# Altium PCB Dental Sensor - V400.PcbDoc
Units mm, origin at the board's own origin, x right, y up, seen from the top; angles counter-clockwise.
Board outline 55.82 x 8.5 mm, 2 copper layers (Top Layer, Bottom Layer), stack 0.287 mm thick; 23 components, 22 nets, 134 pads, 74 vias.
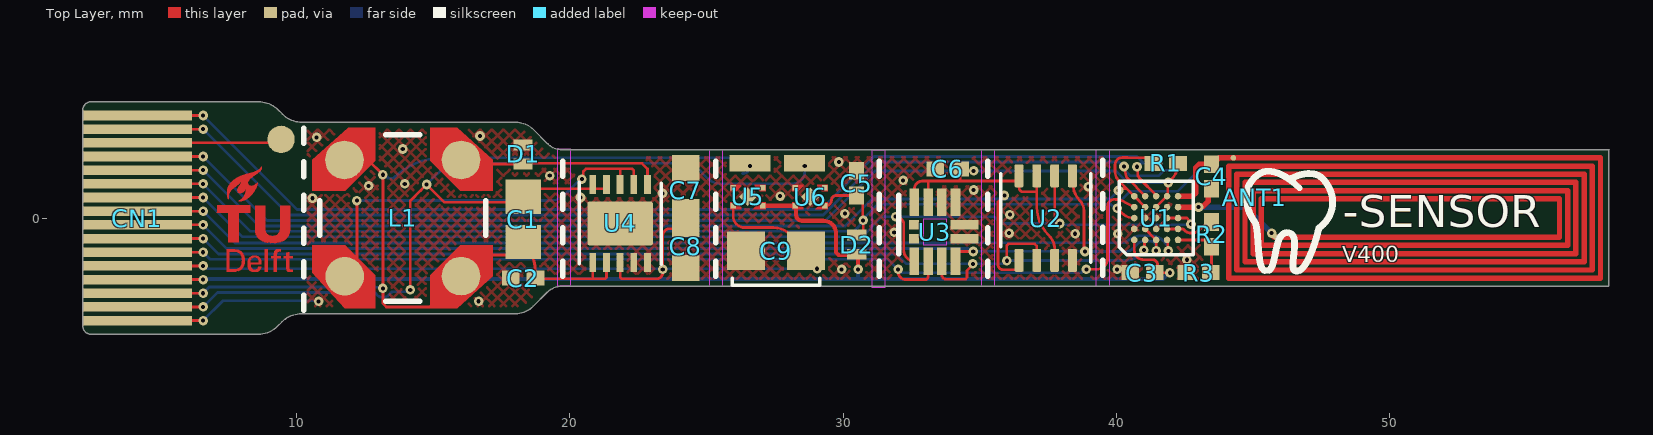
[diagram p0: Top Layer view]
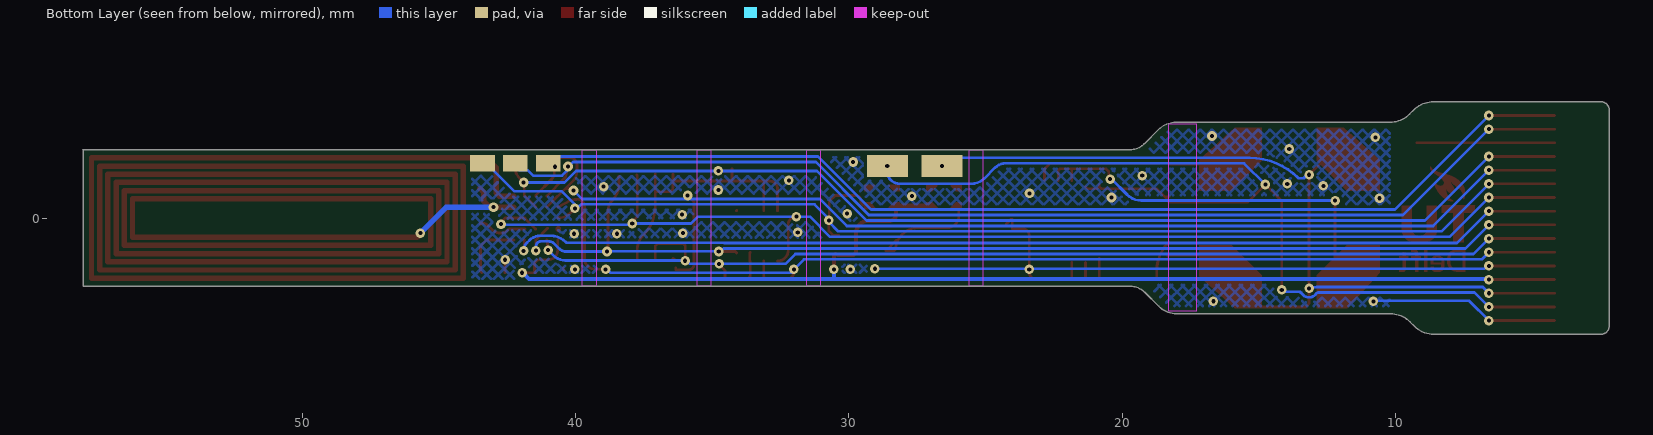
[diagram p1: Bottom Layer view, seen from below]

## Layer stack, top to bottom
Flex Stack Top Coverlay: solder mask 0.05, FC-001, Dk 4
Top Layer: signal copper 0.018
Core: core 0.051, Core-025, Dk 4.6
Bottom Layer: signal copper 0.018
Flex Stack Bottom Coverlay: solder mask 0.05, FC-001, Dk 4
Stiffener 1: core 0.2, Core-009, Dk 4.5

## Board outline
2.491,-4.25 8.607,-4.25 ccw(c8.607,-3.224) 9.332,-3.949 9.481,-3.801 cw(c10.207,-4.526) 10.207,-3.5 18.025,-3.5 ccw(c18.025,-2.595) 18.665,-3.235 19.188,-2.712 cw(c19.7,-3.224) 19.7,-2.5 58,-2.5 58,2.5 58.018,2.5 19.718,2.5 cw(c19.718,3.224) 19.206,2.712 18.683,3.235 ccw(c18.043,2.595) 18.043,3.5 10.225,3.5 cw(c10.225,4.526) 9.499,3.801 9.351,3.949 ccw(c8.625,3.224) 8.625,4.25 2.509,4.25 ccw(c2.5,3.95) 2.2,3.959 2.2,-3.941 ccw(c2.5,-3.95)

## Design rules (kind name [scope] priority, off if disabled: settings)
BoardOutlineClearance "Edge Connector" [HasFootprint('52745-1297') or HasFootprint('52745-1497') or HasFootprint('52745-1697')] p1: gap=0 ignorepadtopadclearanceinfootprint=FALSE
BoardOutlineClearance [All] p2: gap=0.2 ignorepadtopadclearanceinfootprint=FALSE
Clearance Clearance_Testpad [InComponent('TP*')] p1: gap=0.1 ignorepadtopadclearanceinfootprint=FALSE except(0.06: Arc-SMDPad Track-SMDPad SMDPad-SMDPad)
Clearance [All] p2: gap=0.1 ignorepadtopadclearanceinfootprint=FALSE
ComponentClearance [InComponent('TP*')] p1: gap=0 collisioncheckmode=3 verticalgap=0.15 showdistances=FALSE
ComponentClearance ComponentClearance_1 [All] p2: gap=0.15 collisioncheckmode=3 verticalgap=0.15 showdistances=FALSE
DiffPairsRouting [All] p1: maxlimit=0.254 minlimit=0.254 mostfreqgap=0.254 toplayer_minwidth=0.381 toplayer_maxwidth=0.381 toplayer_prefwidth=0.381 bottomlayer_minwidth=0.381 bottomlayer_maxwidth=0.381 bottomlayer_prefwidth=0.381 substack1={9C96DA8B-F9AD-4D0B-9D00-B80C23C507E5} toplayer_{9c96da8b-f9ad-4d0b-9d00-b80c23c507e5}_minwidth=0.381 toplayer_{9c96da8b-f9ad-4d0b-9d00-b80c23c507e5}_maxwidth=0.381 toplayer_{9c96da8b-f9ad-4d0b-9d00-b80c23c507e5}_prefwidth=0.381 bottomlayer_{9c96da8b-f9ad-4d0b-9d00-b80c23c507e5}_minwidth=0.381 bottomlayer_{9c96da8b-f9ad-4d0b-9d00-b80c23c507e5}_maxwidth=0.381 bottomlayer_{9c96da8b-f9ad-4d0b-9d00-b80c23c507e5}_prefwidth=0.381 maxuncoupledlength=12.7
HoleSize [All] p1: absolutevalues=TRUE maxlimit=2.54 minlimit=0.15 maxpercent=80.000 minpercent=20.000
MinimumAnnularRing [All] p1: minimumring=0.1
MinimumSolderMaskSliver BGA [HasFootprint('WLCSP25')] p1: minsoldermaskwidth=0.06
MinimumSolderMaskSliver [All] p2: minsoldermaskwidth=0.09
PolygonConnect [All] p1: connectstyle=Direct reliefconductorwidth=0.254 reliefentries=4 polygonreliefangle="90 Angle" airgapwidth=0.1
RoutingVias [All] p1: holewidth=0.15 width=0.35 viastyle="Through Hole" minholewidth=0.15 minwidth=0.35 maxholewidth=1 maxwidth=2
SilkToSolderMaskClearance [IsPad] p1: minsilkscreentomaskgap=0.2 clearancetoexposedcopper=TRUE
SolderMaskExpansion [All] p1: expansion=0.102 istentingtop=FALSE
UnRoutedNet [All] p1: checkbadconnections=TRUE
Width [All] p1: maxlimit=1 minlimit=0.06 preferedwidth=0.15 substack1={9C96DA8B-F9AD-4D0B-9D00-B80C23C507E5} minimp=50.000000 maximp=50.000000 favimp=50.000000
24 further rules are at their usual default settings.

## Components (designator, comment, footprint, x,y, rotation, side; value= is the part's Value field where it differs from the comment)
ANT1 "Antenna" "NFC Antenna" 50.775,-0.1 r0 top net-tie
C1 "100µF" CAPC2012X12N 18.3,-0.05 r90 top
C2 "4.7µF" RESC1005X03N 18.3,-2.2 r180 top
C3 "0.10µF" RESC1005X03N 40.95,-2 r180 top
C4 "300pF" RESC1005X03N 43.475,1.52 r90 top
C5 "10µF" RESC1005X03N 30.5,1.275 r90 top
C6 "0.10µF" RESC1005X03N 33.825,1.8 r180 top
C7 "47µF" CAPC1608X12N 24.25,1.025 r90 top
C8 "47µF" CAPC1608X12N 24.25,-1.025 r270 top
C9 "CPH3225A" CPH3225A 27.55,-1.2 r180 top
CN1 "FPC Connector" 52745-1697 4.2,0 r0 top
D1 "BAS70LP-7B" FP-X1-DFN1006-2-MFG 18.3,2.325 r90 top value=1pF
D2 "BAS70LP-7B" FP-X1-DFN1006-2-MFG 30.5,-0.975 r90 top value=1pF
L1 "LPR6235-123QMRC" LPR6235 13.9,0 r90 top
R1 "10k" RESC1005X03N 41.8,2 r0 top
R2 "1.5M" RESC1005X03N 43.475,-0.6 r90 top
R3 "470k" RESC1005X03N 43,-2 r0 top
U1 "NHS3152UK" WLCSP25 41.45,0 r90 top
U2 "CY15B104QI-20LPXC" 8-GQFN 37.413,0 r90 top
U3 "LIS2DW12TR" FP-LGA12-DM00170568-MFG 33.363,-0.5 r90 top
U4 "MCRY12-125Q-33DIT" 10DFN 21.85,-0.2 r0 top
U5 "XC6136N18" USPQ-4B05 26.525,0.775 r90 top
U6 "XC6136C19" USPQ-4B05 28.8,0.775 r90 top

## Footprints (in the part's own frame and the unit in brackets; to place one, negate y for a bottom-side part, rotate by r counter-clockwise, add the part's x,y. Pads: shape width x height; smd on the part's side, far side on the other; paste and mask are expansions set on the pad)
8-GQFN [mm] "8-pin GQFN (3.23 × 3.28 × 0.55 mm)"
  rrect25% 0.84x0.32 smd: 1(-1.545,0.975) 2(-1.545,0.325) 3(-1.545,-0.325) 4(-1.545,-0.975) 5(1.545,-0.975) 6(1.545,-0.325) 7(1.545,0.325) 8(1.545,0.975)
  silkscreen extent -1.62,-1.64 1.62,1.64, body extent -1.62,-1.69 1.62,1.69, height 0.6
10DFN [mm] "10-lead, 3mm × 3mm DFN"
  rect 0.25x0.7 smd mask+0.075: 1(-1,-1.425) 2(-0.5,-1.425) 3(0,-1.425) 4(0.5,-1.425) 5(1,-1.425) 6(1,1.425) 7(0.5,1.425) 8(0,1.425) 9(-0.5,1.425) 10(-1,1.425)
  rrect10% 2.4x1.6 smd mask+0.075: 11(0,0)
  silkscreen extent -1.5,-1.49 1.5,1.5, body extent -1.5,-1.52 1.5,1.52, height 0.8
52745-1697 [mm] "Cable Side"
  rect 4x0.35 smd paste-2: 1(0,-3.75) 2(0,-3.25) 3(0,-2.75) 4(0,-2.25) 5(0,-1.75) 6(0,-1.25) 7(0,-0.75) 8(0,-0.25) 9(0,0.25) 10(0,0.75) 11(0,1.25) 12(0,1.75) 13(0,2.25) 14(0,2.75) 15(0,3.25) 16(0,3.75)
CAPC1608X12N [mm] "Chip Capacitor, 2-Leads, Body 1,60x0,80mm, IPC Medium Density"
  rect 0.95x1 smd: 1(-0.8,0) 2(0.8,0)
  body extent -0.9,-0.5 0.9,0.5, height 1.2
CAPC2012X12N [mm] "Chip Capacitor, 2-Leads, Body 2,00x1,15mm, IPC Medium Density"
  rect 1.25x1.3 smd: 1(-0.825,0) 2(0.825,0)
  body extent -1.1,-0.63 1.1,0.63, height 1.25
CPH3225A [mm]
  rect 1.4x1.4 smd: 1(-1.1,0) 2(1.1,0)
  silkscreen extent -1.6,1 1.6,1.25, body extent -1.6,-1.25 1.6,1.25, height 1
FP-LGA12-DM00170568-MFG [mm]
  rect 0.375x0.35 smd paste+0 mask+0: 1(-0.763,0.75) 2(-0.763,0.25) 3(-0.763,-0.25) 4(-0.763,-0.75) 7(0.763,-0.75) 8(0.763,-0.25) 9(0.763,0.25) 10(0.763,0.75)
  rect 0.35x0.375 smd paste+0 mask+0: 5(-0.25,-0.763) 6(0.25,-0.763) 11(0.25,0.763) 12(-0.25,0.763)
  silkscreen extent -0.8,1.33 1.33,1.33, body extent -1.55,-1.55 1.55,1.55, height 0.25
FP-X1-DFN1006-2-MFG [mm]
  rect 0.4x0.7 smd paste+0 mask+0: 1(-0.35,0) 2(0.35,0)
  body extent -0.65,-0.45 0.65,0.45, height 0.25
LPR6235 [mm] "Coupled Inductors"
  round 1.413 smd paste+0 mask+0: 1(-2.131,2.123) 2(-2.123,-2.131) 3(2.123,-2.131) 4(2.123,2.131)
  Top Layer region: -3.3,-1 -2.1,-1 -1,-2.1 -1,-3.3 -2.125,-3.3 -3.3,-2 -3.3,-1
  Top Layer region: 3.3,-1 2.1,-1 1,-2.1 1,-3.3 2.125,-3.3 3.3,-2 3.3,-1
  Top Layer region: 3.3,1 2.1,1 1,2.1 1,3.3 2.125,3.3 3.3,2 3.3,1
  Top Layer region: -1,3.3 -1,2.1 -2.1,1 -3.3,1 -3.3,2.125 -2,3.3 -1,3.3
  silkscreen extent -3.04,-3.04 3.04,3.04, body extent -3.4,-3.4 3.4,3.4, height 0.25
"NFC Antenna" [mm] "4.5 x 15 mm"
  round 0.2 smd paste-2 mask+0.102: 1(-6.5,2.3) 2(-4.95,-0.6)
  Top Layer lines w0.2: -6.5,2.3 6.925,2.3 6.925,-2.1 -6.675,-2.1 -6.675,2 6.625,2 6.625,-1.8 -6.375,-1.8 -6.375,1.7 6.325,1.7 6.325,-1.5 -6.075,-1.5 -6.075,1.4 6.025,1.4 6.025,-1.175 ; -4.95,-0.6 5.425,-0.6 5.425,0.8 -5.475,0.8 -5.475,-0.9 5.725,-0.9 5.725,1.1 -5.775,1.1 -5.775,-1.2 6.025,-1.2
RESC1005X03N [mm] "Chip Resistor, 2-Leads, Body 1,00x0,50mm, IPC Medium Density"
  rect 0.65x0.55 smd mask+0.075: 1(-0.45,0) 2(0.45,0)
  body extent -0.55,-0.27 0.55,0.28, height 0.3
USPQ-4B05 [mm] "USPQ-4B05 Torex"
  rect 0.2x0.2 smd paste+0 mask+0: 1(-0.325,-0.54) 2(0.325,-0.54) 3(0.325,0.54) 4(-0.325,0.54)
  rect 0.48x0.48 smd rot 45 mask+0.075: 5(0,0)
  Top Layer region: 0.45,-0.65 0.45,-0.25 0.38,-0.25 0.2,-0.43 0.2,-0.65
  Top Layer region: -0.45,-0.65 -0.45,-0.18 -0.2,-0.43 -0.2,-0.65
  Top Layer region: 0.45,0.65 0.45,0.25 0.38,0.25 0.2,0.43 0.2,0.65
  Top Layer region: -0.45,0.65 -0.45,0.25 -0.38,0.25 -0.2,0.43 -0.2,0.65
  body extent -0.5,-0.5 0.5,0.5, height 0.34
WLCSP25 [mm]
  round 0.24 smd paste+0.018 mask+0.04: A1(-0.8,0.8) A2(-0.4,0.8) A3(0,0.8) A4(0.4,0.8) A5(0.8,0.8) B1(-0.8,0.4) B2(-0.4,0.4) B3(0,0.4) B4(0.4,0.4) B5(0.8,0.4) C1(-0.8,0) C2(-0.4,0) C3(0,0) C4(0.4,0) C5(0.8,0) D1(-0.8,-0.4) D2(-0.4,-0.4) D3(0,-0.4) D4(0.4,-0.4) D5(0.8,-0.4) E1(-0.8,-0.8) E2(-0.4,-0.8) E3(0,-0.8) E4(0.4,-0.8) E5(0.8,-0.8)
  silkscreen extent -1.35,-1.35 1.35,1.35, body extent -1.27,-1.27 1.27,1.27, height 0.54

## Part data
ANT1: library part "NFC Antenna", "Track 0.2; Gap 0.1; Height 4.6; Width 14.5;"
C1: library part GRM21BC80E107ME15L, "CAP CER 100UF 2.5V X6S 0805", Digi-Key Part Number=490-13977-1-ND, Manufacturer="Murata Electronics North America", Operating Temperature="-55°C ~ 105°C", Package / Case=0805, Ratings=-, Temperature Coefficient=X6S, Tolerance=±20%, Voltage=2.5V, @ qty=0, Applications="General Purpose", Datasheets=http://search.murata.co.jp/Ceramy/image/img/A01X/G101/ENG/GRM21BC80E107ME15-01.pdf, Factory Stock=0, Features=-, Height - Seated (Max)=-, Image=//media.digikey.com/Renders/Murata%20Renders/0805%20(2012%20Metric)%20.85mm.jpg, Lead Spacing=-, Lead Style=-, Minimum Quantity=1, Mounting Type="Surface Mount, MLCC", Packaging="Cut Tape (CT)", Part Number=GRM21BC80E107ME15L, Part Status=Active, Quantity Available=5990, Series=GRM, Size / Dimension="0.079\" L x 0.049\" W (2.00mm x 1.25mm)", Thickness (Max)="0.057\" (1.45mm)", Unit Price (USD)=2.17
C2: library part GRM155R60J475ME87D, "CAP CER 4.7UF 6.3V X5R 0402", Digi-Key Part Number=490-5408-1-ND, Manufacturer="Murata Electronics North America", Operating Temperature="-55°C ~ 85°C", Package / Case="0402 (1005 Metric)", Ratings=-, Temperature Coefficient=X5R, Tolerance=±20%, Voltage=6.3V, @ qty=0, Applications="General Purpose", Datasheets=http://www.murata.com/~/media/webrenewal/support/library/catalog/products/capacitor/mlcc/c02e.pdf, Factory Stock=0, Features="Derating Recommended", Height - Seated (Max)=-, Image=//media.digikey.com/Renders/Murata%20Renders/ZRB-SERIES-0402.jpg, Lead Spacing=-, Lead Style=-, Minimum Quantity=1, Mounting Type="Surface Mount, MLCC", Packaging="Cut Tape (CT)", Part Number=GRM155R60J475ME87D, Part Status=Active, Quantity Available=226483, Series=GRM, Size / Dimension="0.039\" L x 0.020\" W (1.00mm x 0.50mm)", Thickness (Max)="0.022\" (0.55mm)", Unit Price (USD)=0.14
C3 C6: library part GRM155R60J104KA01D, "CAP CER 0.1UF 6.3V X5R 0402", Digi-Key Part Number=490-6287-1-ND, Manufacturer="Murata Electronics North America", Operating Temperature="-55°C ~ 85°C", Package / Case="0402 (1005 Metric)", Ratings=-, Temperature Coefficient=X5R, Tolerance=±10%, Voltage=6.3V, @ qty=0, Applications="General Purpose", Datasheets=http://www.murata.com/~/media/webrenewal/support/library/catalog/products/capacitor/mlcc/c02e.pdf, Factory Stock=0, Features=-, Height - Seated (Max)=-, Image=//media.digikey.com/Renders/Murata%20Renders/ZRB-SERIES-0402.jpg, Lead Spacing=-, Minimum Quantity=1, Mounting Type="Surface Mount, MLCC", Packaging="Cut Tape (CT)", Part Number=GRM155R60J104KA01D, Part Status=Active, Quantity Available=356062, Series=GRM, Size / Dimension="0.039\" L x 0.020\" W (1.00mm x 0.50mm)", Thickness (Max)="0.022\" (0.55mm)", Unit Price (USD)=0.1
C4: library part GRM1555C1H301JA01D, "CAP CER 300PF 50V NP0 0402", Digi-Key Part Number=490-3234-1-ND, Manufacturer="Murata Electronics North America", Operating Temperature="-55°C ~ 125°C", Package / Case="0402 (1005 Metric)", Ratings=-, Temperature Coefficient="C0G, NP0", Tolerance=±5%, Voltage=50V, @ qty=0, Applications="General Purpose", Datasheets=http://www.murata.com/~/media/webrenewal/support/library/catalog/products/capacitor/mlcc/c02e.pdf, Factory Stock=0, Features=-, Height - Seated (Max)=-, Image=//media.digikey.com/Renders/Murata%20Renders/ZRB-SERIES-0402.jpg, Lead Spacing=-, Lead Style=-, Minimum Quantity=1, Mounting Type="Surface Mount, MLCC", Packaging="Cut Tape (CT)", Part Number=GRM1555C1H301JA01D, Part Status=Active, Quantity Available=73694, Series=GRM, Size / Dimension="0.039\" L x 0.020\" W (1.00mm x 0.50mm)", Thickness (Max)="0.022\" (0.55mm)", Unit Price (USD)=0.1
C5: library part GRJ155R60J106ME11D, "CAP CER 10UF 6.3V X5R 0402", Digi-Key Part Number=490-13211-1-ND, Manufacturer="Murata Electronics North America", Operating Temperature="-55°C ~ 85°C", Package / Case="0402 (1005 Metric)", Ratings=-, Temperature Coefficient=X5R, Tolerance=±20%, Voltage=6.3V, @ qty=0, Applications="Boardflex Sensitive", Datasheets=http://psearch.en.murata.com/capacitor/product/GRJ155R60J106ME11%23.pdf, Factory Stock=0, Features="Derating Recommended, Soft Termination", Height - Seated (Max)=-, Image=//media.digikey.com/Renders/Murata%20Renders/ZRB-SERIES-0402.jpg, Lead Spacing=-, Lead Style=-, Minimum Quantity=1, Mounting Type="Surface Mount, MLCC", Packaging="Cut Tape (CT)", Part Number=GRJ155R60J106ME11D, Part Status=Active, Quantity Available=64064, Series=GRJ, Size / Dimension="0.039\" L x 0.020\" W (1.00mm x 0.50mm)", Thickness (Max)="0.028\" (0.70mm)", Unit Price (USD)=0.23
C7 C8: library part GRJ155R60J106ME11D, "CAP CER 47UF 6.3V X5R 0603", Digi-Key Part Number=490-13211-1-ND, Manufacturer="Murata Electronics North America", Operating Temperature="-55°C ~ 85°C", Package / Case=0603, Ratings=-, Temperature Coefficient=X5R, Tolerance=±20%, Voltage=6.3V, @ qty=0, Applications="Boardflex Sensitive", Datasheets=http://psearch.en.murata.com/capacitor/product/GRJ155R60J106ME11%23.pdf, Factory Stock=0, Features="Derating Recommended, Soft Termination", Height - Seated (Max)=-, Image=//media.digikey.com/Renders/Murata%20Renders/ZRB-SERIES-0402.jpg, Lead Spacing=-, Lead Style=-, Minimum Quantity=1, Mounting Type="Surface Mount, MLCC", Packaging="Cut Tape (CT)", Part Number=GRJ155R60J106ME11D, Part Status=Active, Quantity Available=64064, Series=GRJ, Size / Dimension="0.039\" L x 0.020\" W (1.00mm x 0.50mm)", Thickness (Max)="0.028\" (0.70mm)", Unit Price (USD)=0.23
C9: "Supercapacitors / Ultracapacitors Reflow EDLC 3.3V, 11mF, 160 Ohm", Capacity="11 mF"
CN1: library part 52745-1697, "FFC / FPC Board Connector, 0.5 mm, 16 Contacts, Receptacle, Easy-On 52745, Surface Mount, Top"
D1 D2: library part CMP-12790-000002-1, "DIODE SCHTTKY 70V 70MA X1DFN1006", Capacitance=1pF, Forward Current=70mA, Manufacturer="Diodes Inc.", Max Junction Temp=+150°C, Max Repetitive Reverse Voltage=70V, Max Surge Forward Current=800mA, Package=X1-DFN1006-2, Peak Reverse Current=0.1uA, Temperature="-65°C to +150°C", Temperature Range Low=-65°C, Automotive=No, Category=Diode, ComponentLink2Description=Datasheet, ComponentLink2URL=https://www.diodes.com/assets/Datasheets/BAS70LP.pdf, Device Class L1="Discrete Semiconductors", Device Class L2=Diodes, Device Class L3="Schottky Diodes", Digikey Description="DIODE SCHTTKY 70V 70MA X1DFN1006", Footprint Url=https://www.diodes.com/assets/Package-Files/X1-DFN1006-2.pdf, Height=0.53mm, Lead Free=Yes, Manufacturer Part Number=BAS70LP-7B, Mouser Description="Schottky Diodes & Rectifiers Schottky Diode", Octopart=https://octopart.com/bas70lp-7b-diodes+inc.-22053921, Reverse Voltage=70V, RoHS=TRUE, Standoff Height=0mm, Temperature Range High=+150°C
L1: "Gekoppelde smoorspoelen 12.5uH 12% 900mA 200 Ohms"
R1: library part ERJ-2GEJ103X, "RES SMD 10K OHM 5% 1/10W 0402", Digi-Key Part Number=P10KJCT-ND, Manufacturer="Panasonic Electronic Components", Operating Temperature="-55°C ~ 155°C", Package / Case="0402 (1005 Metric)", Power (Watts)="0.1W, 1/10W", Supplier Device Package=0402, Temperature Coefficient=±200ppm/°C, Tolerance=±5%, @ qty=1500, Composition="Thick Film", Datasheets=http://industrial.panasonic.com/www-cgi/jvcr13pz.cgi?E+PZ+3+AOA0001+ERJ2GEJ103X+7+WW, Factory Stock=0, Failure Rate=-, Features="Automotive AEC-Q200", Height - Seated (Max)="0.016\" (0.40mm)", Image=//media.digikey.com/Photos/Panasonic%20Photos/ERJ-PA2-Series.jpg, Minimum Quantity=1, Number of Terminations=2, Packaging="Cut Tape (CT)", Part Number=ERJ-2GEJ103X, Part Status=Active, Quantity Available=2560215, Series=ERJ, Size / Dimension="0.039\" L x 0.020\" W (1.00mm x 0.50mm)", Unit Price (USD)=0.00350
R2: library part ERJ-2GEJ155X, "RES SMD 1.5M OHM 5% 1/10W 0402", Digi-Key Part Number=P1.5MJCT-ND, Manufacturer="Panasonic Electronic Components", Operating Temperature="-55°C ~ 155°C", Package / Case="0402 (1005 Metric)", Power (Watts)="0.1W, 1/10W", Supplier Device Package=0402, Temperature Coefficient="-400/ +150ppm/°C", Tolerance=±5%, @ qty=1500, Composition="Thick Film", Datasheets=http://industrial.panasonic.com/www-cgi/jvcr13pz.cgi?E+PZ+3+AOA0001+ERJ2GEJ155X+7+WW, Factory Stock=0, Failure Rate=-, Features="Automotive AEC-Q200", Height - Seated (Max)="0.016\" (0.40mm)", Image=//media.digikey.com/Photos/Panasonic%20Photos/ERJ-PA2-Series.jpg, Minimum Quantity=1, Number of Terminations=2, Packaging="Cut Tape (CT)", Part Number=ERJ-2GEJ155X, Part Status=Active, Quantity Available=39239, Series=ERJ, Size / Dimension="0.039\" L x 0.020\" W (1.00mm x 0.50mm)", Unit Price (USD)=0.00350
R3: library part ERJ-2RKF4703X, "RES SMD 470K OHM 1% 1/10W 0402", Digi-Key Part Number=P470KLCT-ND, Manufacturer="Panasonic Electronic Components", Operating Temperature="-55°C ~ 155°C", Package / Case="0402 (1005 Metric)", Power (Watts)="0.1W, 1/10W", Supplier Device Package=0402, Temperature Coefficient=±100ppm/°C, Tolerance=±1%, @ qty=1500, Composition="Thick Film", Datasheets=http://industrial.panasonic.com/www-cgi/jvcr13pz.cgi?E+PZ+3+AOA0002+ERJ2RKF4703X+7+WW, Factory Stock=0, Failure Rate=-, Features="Automotive AEC-Q200", Height - Seated (Max)="0.016\" (0.40mm)", Image=//media.digikey.com/Photos/Panasonic%20Photos/ERJ-PA2-Series.jpg, Minimum Quantity=1, Number of Terminations=2, Packaging="Cut Tape (CT)", Part Number=ERJ-2RKF4703X, Part Status=Active, Quantity Available=171557, Series=ERJ, Size / Dimension="0.039\" L x 0.020\" W (1.00mm x 0.50mm)", Unit Price (USD)=0.00496
U1: "ARM-microcontrollers - MCU NTAG NHS3152 NFC"
U2: "FRAM (Ferroelectric RAM) Memory IC 4Mbit SPI 20 MHz 8-GQFN (3.23x3.28)"
U3: library part CMP-12175-000006-1, "ACCEL 2-16G I2C/SPI 12LGA", Manufacturer=STMicroelectronics, Max Supply Voltage=3.6V, Min Supply Voltage=1.62V, Operating Supply Current=0.38-90uA, Package=LGA12-DM00170568, Temperature="-40°C to +85°C", Temperature Range High=+85°C, Temperature Range Low=-40°C, Accel Range=2/4/8/16g, Accel Resolution=14bits, Automotive=No, Category=IC, ComponentLink2Description=Datasheet, ComponentLink2URL=https://www.st.com/resource/en/datasheet/lis2dw12.pdf, Device Class L1=Sensors, Device Class L2="Motion Sensors", Device Class L3=Accelerometers, Digikey Description="ACCEL 2-16G I2C/SPI 12LGA", Footprint Url=https://www.st.com/content/ccc/resource/technical/document/technical_note/73/17/9c/16/dd/96/4a/01/CD00134799.pdf/files/CD00134799.pdf/jcr:content/translations/en.CD00134799.pdf, Height=0.7mm, Lead Free=Yes, Manufacturer Part Number=LIS2DW12TR, Mouser Description="Accelerometer Triple ±2g/±4g/±8g/±16g 1.62V to 3.6V 0.244mg/digit/0.488mg/digit/0.976mg/digit/1.952mg/digit 12-Pin LG...", Octopart=https://octopart.com/lis2dw12tr-stmicroelectronics-77080925, RoHS=TRUE, Sensor Output=I2C,SPI
U4: library part MCRY12, "Matrix Mercury Energy Harvesting Synchronous Boost Converter with Microwatt Cold-Start, Input Impedance Matching and Regulated Output"
U5: library part XC6136N18A9R-G, "Controlecircuits Ultra-Low Power (88nA) Voltage Detector"
U6: library part XC6136C19ANR-G, "Controlecircuits Ultra-Low Power (88nA) Voltage Detector"

## Free pads (board coordinates)
  rect 0.35x1 smd paste-1 mask+0: 1(32.613,-1.575) 1(32.613,0.588) 1(33.113,-1.575) 1(33.113,0.588) 1(33.613,-1.587) 1(33.613,0.588) 1(34.113,-1.587) 1(34.113,0.588)
  rect 1x0.35 smd paste-1 mask+0: 1(34.45,-0.75) 1(34.45,-0.25)
  rect 1.5x0.8 smd far side paste-1: 5(26.6,1.9) 5(28.6,1.9)
  rect 1.5x0.6 smd paste-1: 5(26.6,2) 5(28.6,2)
  rect 0.9x0.6 smd far side paste-1: 5(41,2) 5(42.2,2) 5(43.4,2)
  round 1 smd paste-1: 6(9.45,2.875)

## Via types
v1: diameter 0.35, hole 0.15, Top Layer to Bottom Layer, tented both sides, 74 vias

## Nets (pads, with @x,y where several pads share a name; then routed paths per layer and width w, separated by ;. In a path a pad name is that pad's centre, name@x,y a point inside that pad or via, vN(x,y) a via of type N, cw(c..) or ccw(c..) an arc to the next point about the centre after c; other vN are vias at no path point)
AN0_0: R2.1 R3.2 U1.E1 | length 2.3
  Top Layer w0.1: U1.E1 43.25,-0.8 43.475,-1.025 43.475,-1.95 R3.2@43.425,-2
CS_ACC: CN1.6 pad.1@33.113,-1.575 U1.A4 U3.2 | length 41.2
  Top Layer w0.1: CN1.6 v1(6.6,-1.25) ; v1(32.012,-1.875) 32.012,-1.963 ccw(c32.3,-1.963) 32.3,-2.25 33.009,-2.25 ccw(c33.008,-2.15) 33.102,-2.184 ccw(c32.938,-2.125) 33.113,-2.125 pad.1@33.113,-1.575 ; v1(38.9,-1.875) 39.275,-1.875 ccw(c39.275,-1.475) 39.675,-1.475 39.675,0.432 cw(c39.927,0.433) 39.97,0.681 ; 39.982,0.68 40.038,0.678 cw(c40.025,0.353) 40.172,0.643 U1.A4
  Bottom Layer w0.1: v1(6.6,-1.25) 6.862,-1.512 31.65,-1.512 v1(32.012,-1.875) 31.95,-1.937 32.012,-2 38.716,-2 38.841,-1.875 v1(38.9,-1.875)
CS_MEM: CN1.12 R1.1 U1.A5 U1.B4 U2.1 | length 45
  Top Layer w0.1: CN1.12 v1(6.6,1.75) ; v1(35.9,0.825) 35.668,0.593 35.668,-1.697 ccw(c35.864,-1.697) 35.864,-1.894 36.328,-1.894 36.338,-1.884 U2.1@36.338,-1.823 ; U2.1@36.328,-1.539 36.413,-1.496 U2.1@36.438,-1.483 ; v1(40.073,1.008) cw(c40.239,0.842) 40.239,1.076 40.37,1.076 ; U1.B4 U1.A5 40.646,0.8 40.37,1.076 ; R1.1@41.375,2 ccw(c41.175,2) 41.175,2.2 40.41,2.21 40.21,2.21 ccw(c40.21,1.949) 39.95,1.949 39.95,1.7 ccw(c40.441,1.7) 40.094,1.352 40.37,1.076
  Bottom Layer w0.1: v1(6.6,1.75) 8.638,-0.288 30.079,-0.288 31.066,0.7 v1@35.825,0.7 ; v1(35.9,0.825) 35.9,0.775 v1@35.825,0.7 ; v1(40.073,1.008) 39.765,0.7 v1@35.825,0.7
DEBUG: CN1.14 pad.6 | length 5
  Top Layer w0.1: CN1.14 pad.6@9.225,2.75
GND: C2.2 C3.2 C5.2 C6.2 C7.2 C8.2 C9.2 CN1.1 D1.2 pad.1@33.613,0.588 pad.1@34.45,-0.25 pad.1@34.45,-0.75 pad.1@34.113,0.588 R3.1 U1.A2 U1.B3 U1.C3 U1.D4 U2.4 U3.5 U3.6 U3.7 U3.8 U4.4 U4.5 U4.11 U5.3 U5.5 U6.3 U6.5 | length 7.5
  Top Layer w0.1: CN1.1 v1(6.6,-3.75) ; U3.7@34.1,0.275 U3.7 ; C3.2@40.42,-1.9 40.445,-1.875 C3.2@40.445,-1.825 ; R3.1@42.575,-2 v1(42.575,-1.525)
  Top Layer w0.2: U1.A2@40.632,-0.408 U1.A2@40.639,-0.4
  Bottom Layer w0.1: v1(6.6,-3.75) 7.325,-3.025 10.8,-3.025 v1(10.825,-3.05)
  other v1: 16.674,-3.044 29.95,-1.875 40.025,-1.875 38.485,-0.575 40.05,-0.575 36.075,-0.55 31.875,-0.525 36.1,0.125 30.066,0.159 10.6,0.725 20.4,0.75 27.7,0.8 23.4,0.9 34.775,1.025 38.975,1.15 12.65,1.175 13.975,1.25 32.2,1.375 19.275,1.55 29.85,2.05 13.9,2.525 10.75,2.95 16.725,3
LX1: L1.1 U4.7 U4.8 | length 14.5
  Top Layer w0.1: L1.1 12.152,-1.756 12.152,-1.524 12.225,-1.451 v1(12.225,0.637) ; v1(20.45,1.425) 20.498,1.473 20.498,1.692 20.605,1.8 21.85,1.8 ; U4.8@21.85,1.375 21.85,1.8 ; U4.7@22.35,1.375 22.35,1.741 22.291,1.8 21.85,1.8
  Bottom Layer w0.1: v1(12.225,0.637) 19.312,0.637 ccw(c19.312,1.363) 19.825,0.85 20.4,1.425 v1(20.45,1.425)
LX2: D1.1 L1.3 U4.6 | length 7.5
  Top Layer w0.1: 14.958,2.51 15.09,2.51 15.248,2.352 15.803,2.352 L1.3 ; L1.3@16.056,2.023 L1.3@16.179,1.9 ; 16.875,1.975 D1.1 ; D1.1@18.65,2 22.65,2 22.85,1.8 U4.6@22.85,1.375
MEAS_VDD: R2.2 U1.D2 U1.E2 | length 1.8
  Top Layer w0.1: U1.D2 U1.E2 42.402,-0.4 cw(c42.401,-0.5) 42.477,-0.435 ccw(c42.725,-0.225) 42.725,-0.55 ccw(c42.725,-0.225) 42.738,-0.55 cw(c42.742,-0.65) 42.747,-0.55 cw(c42.742,-0.65) 42.749,-0.55 ; 42.75,-0.55 ccw(c42.75,-0.128) 43.049,-0.426 43.176,-0.299 cw(c43.475,-0.597) 43.475,-0.175 R2.2@43.475,-0.225
MISO: CN1.7 pad.1@33.613,-1.587 U1.B1 U2.2 U3.3 | length 42.4
  Top Layer w0.1: CN1.7 v1(6.6,-0.75) ; U3.3 33.625,-1.275 33.625,-1.575 33.613,-1.587 33.613,-2.076 ccw(c33.774,-2.076) 33.774,-2.237 34.474,-2.237 34.532,-2.179 34.532,-1.917 34.75,-1.699 v1(34.75,-1.675) ; v1(35.993,-1.563) 35.988,-1.558 35.988,-1.002 36.046,-0.943 37.007,-0.943 37.088,-1.024 37.088,-1.138 U2.2@37.088,-1.483 ; v1(41,-1.175) 41.025,-1.15 41.025,-0.825 U1.B1
  Bottom Layer w0.1: v1(6.6,-0.75) 7.162,-1.312 31.962,-1.312 32.325,-1.675 35.813,-1.675 35.925,-1.563 v1(35.993,-1.563) ; v1@35.993,-1.55 40.375,-1.55 ccw(c40.375,-0.946) 40.802,-1.373 v1(41,-1.175)
MOSI: CN1.8 pad.1@34.113,-1.587 U1.B2 U1.C1 U2.5 U3.4 | length 42.7
  Top Layer w0.1: CN1.8 v1(6.6,-0.25) ; U3.4 34.113,-1.275 34.162,-1.225 v1(34.761,-1.225) ; U2.5@38.437,1.496 38.408,1.524 38.408,1.243 ccw(c39.258,1.243) 38.657,0.643 cw(c38.289,0.275) 38.81,0.275 38.81,-1.185 v1(38.85,-1.225) ; U1.B2@41.023,-0.373 U1.C1 v1(41.45,-1.194)
  Bottom Layer w0.1: v1(6.6,-0.25) 7.462,-1.112 32.087,-1.112 34.581,-1.113 34.694,-1.225 v1(34.761,-1.225) ; v1@34.714,-1.212 38.838,-1.212 v1(38.85,-1.225) 40.35,-1.225 ccw(c40.35,-0.885) 40.59,-1.125 40.783,-0.933 40.796,-0.922 cw(c41,-1.175) 41,-0.85 41.25,-0.85 cw(c41.25,-1.05) 41.45,-1.05 v1(41.45,-1.194)
NetANT1_1: ANT1.1 C4.2 U1.E5 | length 3.1
  Top Layer w0.2: U1.E5 42.783,0.8 42.9,0.917 42.9,1.848 43.017,1.965 C4.2@43.475,1.965 ; C4.2@43.537,1.988 43.75,2.2 ANT1.1
NetANT1_2: ANT1.2 C4.1 U1.E4 | length 5
  Top Layer w0.2: U1.E4 v1(43,0.4) 43.029,0.429 43.173,0.429 43.355,0.611 43.355,0.93 C4.1@43.5,1.075 ; v1(45.675,-0.55) ccw(c45.825,-0.55) ANT1.2
  Bottom Layer w0.2: v1(43,0.4) 44.725,0.4 v1(45.675,-0.55)
RESET: C5.1 CN1.11 D2.2 pad.5@43.4,2 U1.A3 U6.1 | length 45.3
  Top Layer w0.1: CN1.11 v1(6.6,1.25) ; U6.1@29.375,0.45 ccw(c29.375,0.65) 29.575,0.65 cw(c29.75,0.65) 29.75,0.825 C5.1 30.725,0.6 30.725,-0.075 v1(30.738,-0.088) 30.738,-0.475 30.588,-0.625 D2.2@30.375,-0.625 ; v1@40.025,0.285 v1(40.025,0.353) 40.186,0.192 ccw(c40.65,0.657) U1.A3 U1.A3@40.623,0.027
  Bottom Layer w0.1: v1(6.6,1.25) 8.338,-0.487 30.392,-0.487 30.738,-0.141 v1(30.738,-0.088) ; v1@30.725,-0.075 30.725,-0.033 31.258,0.5 39.795,0.5 39.854,0.441 39.869,0.441 39.926,0.385 39.926,0.369 39.926,0.401 v1@40.025,0.5 ; v1(40.025,0.353) v1@40.025,0.5 ; pad.5@43.4,2 43.25,2 42.225,0.975 40.5,0.975 v1@40.025,0.5
SCLK: CN1.10 pad.1@32.613,-1.575 U1.C2 U1.D3 U1.E3 U2.6 U3.1 | length 45
  Top Layer w0.1: CN1.10 v1(6.6,0.75) ; v1(31.925,0.05) cw(c31.925,-0.25) 32.225,-0.25 32.225,-1.187 ccw(c32.613,-1.187) pad.1@32.613,-1.575 ; U2.6@37.763,1.582 37.738,1.557 U2.6 37.738,0.055 37.925,-0.132 v1(37.925,-0.2) ; U1.C2 41.468,-0.4 41.85,-0.018 U1.D3 ; U1.D3@41.854,0 U1.E3 42.277,0 42.573,0 42.677,-0.104 42.677,-0.177 v1(42.725,-0.225)
  Bottom Layer w0.1: v1(6.6,0.75) 8.038,-0.687 30.688,-0.687 31.425,0.05 35.525,0.05 35.775,-0.2 v1(37.925,-0.2) 37.973,-0.248 38.106,-0.248 38.109,-0.25 40.141,-0.25 v1@42.725,-0.25
SWCLK: CN1.15 pad.5@42.2,2 U1.B5 | length 42
  Top Layer w0.1: CN1.15 v1(6.6,3.25) ; v1(40.275,1.885) 40.36,1.51 ccw(c40.759,1.784) 40.417,1.442 41.05,0.808 U1.B5
  Bottom Layer w0.1: v1(6.6,3.25) 9.738,0.112 29.087,0.112 29.277,0.112 31.212,2.048 40.091,2.048 40.255,1.885 v1(40.275,1.885) ; v1@40.275,1.875 40.323,1.827 40.323,1.715 40.488,1.55 41.55,1.55 41.75,1.75 42.05,1.75 pad.5@42.3,2
SWDIO: CN1.16 pad.5@41,2 U1.C5 | length 40.8
  Top Layer w0.1: CN1.16 v1(6.6,3.75) ; v1@40.788,1.862 40.775,1.875 40.775,1.645 ccw(c41.095,1.645) 40.869,1.419 41.45,0.837 U1.C5
  Bottom Layer w0.1: v1(6.6,3.75) 10.038,0.312 29.194,0.312 31.131,2.25 40.35,2.25 40.75,2.25 41,2 40.9,2 pad.5@40.775,1.875
  other v1: 40.75,1.875
TEG+: C1.1 C2.1 CN1.3 L1.2 L1.4 pad.5@26.6,1.9 pad.5@26.6,2 U4.1 U4.2 | length 41.5
  Top Layer w0.1: CN1.3 v1(6.6,-2.75) ; 12.544,1.956 11.936,1.956 L1.4 12.634,2.123 v1(13.175,1.582) 13.175,-3.125 13.3,-3.25 14.88,-3.25 16.006,-2.123 L1.2 16.804,-1.35 ; 17.104,-1.35 18.3,-1.35 C1.1@18.341,-1.391 ; C1.1 cw(c17.214,-1.961) 18.75,-1.961 C2.1@18.75,-2.15 ; C2.1@18.75,-2.225 20.821,-2.225 ; U4.1@20.85,-1.475 20.85,-2.196 20.821,-2.225 ; U4.2 21.35,-2.15 cw(c21.275,-2.15) 21.348,-2.169 21.321,-2.196 21.294,-2.223 cw(c21.275,-2.15) 21.276,-2.225 20.821,-2.225
  Bottom Layer w0.1: v1(6.6,-2.75) 6.825,-2.525 12.908,-2.525 12.91,-2.527 13.127,-2.527 v1(13.175,-2.575) ; v1(13.175,1.582) 13.243,1.582 13.369,1.456 13.556,1.456 cw(c15.352,-0.34) 15.352,2.2 25.876,2.2 cw(c25.876,1.176) v1(26.6,1.9) cw(c26.325,1.9) pad.5@26.325,1.625
TEG-: C1.2 CN1.2 pad.5@28.6,1.9 pad.5@28.6,2 U4.9 U4.10 | length 36.7
  Top Layer w0.1: CN1.2 v1(6.6,-3.25) ; v1(14.175,-2.625) 14.175,0.625 14.55,1 ; 14.575,1.025 v1(14.775,1.225) 15.425,0.575 18.3,0.575 18.3,0.625 C1.2@18.45,0.775 ; C1.2 C1.2@18.45,0.775 ; U4.10@20.85,1.141 20.925,1.066 21.275,1.066 U4.9@21.35,1.141 ; U4.10 20.85,1.15 20.775,1.075 18.75,1.075 C1.2@18.45,0.775
  Bottom Layer w0.1: v1(6.6,-3.25) 7.125,-2.725 12.832,-2.725 cw(c12.831,-2.825) 12.91,-2.763 12.912,-2.766 ccw(c13.175,-2.575) 13.451,-2.746 cw(c13.536,-2.8) 13.535,-2.7 13.994,-2.7 ccw(c13.994,-2.444) v1(14.175,-2.625) ; v1(14.775,1.225) 15.55,2 24.275,2 cw(c24.275,1.457) 24.659,1.841 25.049,1.451 ccw(c25.519,1.92) 25.519,1.256 28.159,1.256 ccw(c28.159,1.697) 28.6,1.697 v1(28.6,1.9)
VDD: C3.1 CN1.4 D2.1 U1.A1 U5.1 U6.4 | length 45.9
  Top Layer w0.1: CN1.4 v1(6.6,-2.25) ; U1.A1 40.65,-1.175 ccw(c41,-1.175) 41,-1.525 41.325,-1.525 cw(c41.325,-1.7) 41.5,-1.7 41.5,-1.96 cw(c41.46,-1.96) 41.46,-2 v1(41.95,-2)
  Top Layer w0.15: U5.1 U6.4 28.285,0.425 28.285,0.118 ccw(c28.503,0.118) 28.503,-0.1 29.275,-0.1 cw(c29.275,-0.575) 29.75,-0.575 29.75,-1.262 29.838,-1.35 D2.1@30.4,-1.35 ; D2.1 30.55,-1.375 v1(30.55,-1.875)
  Bottom Layer w0.15: v1(6.6,-2.25) 6.625,-2.225 30.55,-2.225 ; v1(30.55,-1.875) 30.55,-2.225 ; v1(41.95,-2) 41.921,-2 41.696,-2.225 30.55,-2.225
VEXT: C6.1 CN1.13 pad.1@32.613,0.588 pad.1@33.113,0.588 R1.2 U1.C4 U1.D5 U2.3 U2.7 U2.8 U3.9 U3.10 | length 53.1
  Top Layer w0.1: CN1.13 v1(6.6,2.25) ; U3.10 32.613,0.588 32.613,1.062 cw(c32.9,1.062) 32.9,1.35 33.125,1.35 ; U3.9 33.113,0.588 33.113,1.32 cw(c33.155,1.32) 33.125,1.35 ; C6.1 C6.1@34.275,1.788 ; v1(34.775,1.723) 34.34,1.723 C6.1@34.275,1.788 ; U2.8@36.378,1.35 U2.8@36.328,1.35 ; U2.8@36.438,1.607 U2.8 U2.8@36.438,1.46 ; U2.7@37.088,1.607 37.088,0.957 ; U2.3 37.738,-1.116 ; 37.738,-1.115 ccw(c37.147,-1.115) 37.693,-0.889 ccw(c36.952,-1.196) 37.518,-0.628 cw(c38.56,0.412) 37.088,0.412 37.088,0.957 ; U1.C4 U1.D5 41.875,0.825 41.875,1.275 v1(41.9,1.3) 42.003,1.403 ccw(c41.405,2) R1.2 ; R1.2@42.175,2 R1.2@42.225,2 ; 33.125,1.35 34.275,1.35 ; 34.275,1.35 U2.8@36.328,1.35 ; 34.275,1.35 C6.1@34.275,1.788 ; U2.8@36.328,1.35 U2.8@36.438,1.46 ; U2.8@36.438,1.46 36.438,1.113 ccw(c36.594,1.113) 36.594,0.957 37.088,0.957
  Bottom Layer w0.1: v1(6.6,2.25) 8.938,-0.088 29.359,-0.088 31.17,1.723 33.75,1.723 ; 33.751,1.724 33.752,1.723 v1(34.775,1.723) 39.977,1.723 40.4,1.3 v1(41.9,1.3)
VSTORE: C7.1 C8.1 C9.1 CN1.5 U4.3 U5.4 | length 34.2
  Top Layer w0.1: CN1.5 v1(6.6,-1.75) ; U4.3 21.85,-2.166 21.879,-2.196 21.909,-2.225 23.175,-2.225 ccw(c23.175,-1.99) 23.41,-1.99 v1(23.41,-1.875) 23.41,-0.64 cw(c23.659,-0.64) 23.659,-0.391 24.017,-0.391 24.034,-0.375 24.034,-0.04 24.065,-0.04 C8.1 ; U5.4 25.985,0.066 ccw(c26.401,0.066) 26.401,-0.35 27.453,-0.35 cw(c27.453,-1.2) 28.298,-1.111 ccw(c28.397,-1.1) 28.298,-1.116 28.303,-1.141 28.319,-1.162 ccw(c28.397,-1.1) 28.333,-1.177 28.361,-1.2 28.397,-1.2 C9.1 C9.1@28.259,-0.809
  Bottom Layer w0.1: v1(6.6,-1.75) 6.668,-1.75 6.768,-1.85 v1@23.41,-1.85 ; v1@23.416,-1.856 v1(29.05,-1.856)
WAKE_UP: CN1.9 U1.D1 | length 39
  Top Layer w0.1: CN1.9 v1(6.6,0.25) ; U1.D1@41.863,-0.8 41.875,-0.812 41.875,-1.176 v1(41.9,-1.201)
  Bottom Layer w0.1: v1(6.6,0.25) 7.762,-0.912 34.569,-0.912 34.581,-0.9 40.314,-0.9 ccw(c40.314,-0.849) 40.35,-0.885 cw(c40.918,-1.453) 40.918,-0.65 41.293,-0.65 cw(c41.293,-1.21) 41.689,-0.814 41.776,-0.901 cw(c41.475,-1.201) v1(41.9,-1.201)
pads on no net: U3.11 U3.12 U5.2 U6.2

## Polygon pours and split planes (outlines as drawn)
no net on Layer0 "Default Coverlay 1 Top" (split plane): 2.491,-4.25 8.607,-4.25 8.708,-4.25 8.906,-4.211 9.093,-4.133 9.261,-4.021 9.332,-3.949 9.481,-3.801 9.556,-3.733 9.723,-3.621 9.909,-3.544 10.106,-3.505 10.207,-3.5 18.114,-3.5 18.289,-3.465 18.454,-3.397 18.602,-3.298 18.665,-3.235 19.188,-2.712 19.241,-2.664 19.359,-2.586 19.49,-2.531 19.629,-2.503 19.7,-2.5 58,-2.5 58,2.5 58.018,2.5 19.718,2.5 19.647,2.503 19.508,2.531 19.377,2.586 19.259,2.664 19.206,2.712 18.683,3.235 18.62,3.298 18.472,3.397 18.307,3.465 18.132,3.5 18.043,3.5 10.225,3.5 10.124,3.505 9.927,3.544 9.741,3.621 9.574,3.733 9.499,3.801 9.351,3.949 9.279,4.021 9.111,4.133 8.924,4.211 8.726,4.25 8.625,4.25 2.509,4.25 2.449,4.252 2.338,4.209 2.251,4.128 2.202,4.019 2.2,3.959 2.2,-3.941 2.198,-4.001 2.241,-4.112 2.322,-4.199 2.431,-4.248 2.491,-4.25
no net on Layer0 "Default Coverlay 1 Bottom" (split plane): 2.491,-4.25 8.607,-4.25 8.708,-4.25 8.906,-4.211 9.093,-4.133 9.261,-4.021 9.332,-3.949 9.481,-3.801 9.556,-3.733 9.723,-3.621 9.909,-3.544 10.106,-3.505 10.207,-3.5 18.114,-3.5 18.289,-3.465 18.454,-3.397 18.602,-3.298 18.665,-3.235 19.188,-2.712 19.241,-2.664 19.359,-2.586 19.49,-2.531 19.629,-2.503 19.7,-2.5 58,-2.5 58,2.5 58.018,2.5 19.718,2.5 19.647,2.503 19.508,2.531 19.377,2.586 19.259,2.664 19.206,2.712 18.683,3.235 18.62,3.298 18.472,3.397 18.307,3.465 18.132,3.5 18.043,3.5 10.225,3.5 10.124,3.505 9.927,3.544 9.741,3.621 9.574,3.733 9.499,3.801 9.351,3.949 9.279,4.021 9.111,4.133 8.924,4.211 8.726,4.25 8.625,4.25 2.509,4.25 2.449,4.252 2.338,4.209 2.251,4.128 2.202,4.019 2.2,3.959 2.2,-3.941 2.198,-4.001 2.241,-4.112 2.322,-4.199 2.431,-4.248 2.491,-4.25
GND on Top Layer "Top ground" (hatched 45Degree grid 0.3 track 0.1, remove dead copper, pour order 1): 18.616,3.5 19.914,2.5 43.775,2.5 43.775,-2.5 21.056,-2.502 19.846,-3.356 10.425,-3.466 10.425,3.5
GND on Bottom Layer "Bottom Ground" (hatched 45Degree grid 0.3 track 0.1, remove dead copper, pour order 3): 18.396,3.5 19.694,2.5 43.775,2.5 43.775,-2.5 20.264,-2.502 19.041,-3.365 10.225,-3.468 10.225,3.5

## Keep-outs
Top Layer:
  rectangle: 19.55,-2.483 20.05,2.517
  rectangle: 32.925,-0.975 33.8,-0.05
  rectangle: 25.1,-2.5 25.6,2.5
  rectangle: 39.25,-2.5 39.75,2.5
  rectangle: 35.05,-2.5 35.55,2.5
  rectangle: 31.05,-2.525 31.55,2.475
Bottom Layer:
  rectangle: 31.05,-2.5 31.55,2.5
  rectangle: 25.1,-2.5 25.6,2.5
  rectangle: 35.05,-2.5 35.55,2.5
  rectangle: 39.25,-2.5 39.75,2.5
  rectangle: 17.3,-3.4 18.3,3.453

## Other copper
Top Layer:
  region: 1200 vertices and 0 holes, not listed, extent 7.475,0.61 8.749,1.869
  region: 396 vertices and 0 holes, not listed, extent 8.5,-0.915 9.779,0.45
  region: 7.525,-0.341 7.525,0.191 7.52,0.191 7.52,0.196 7.108,0.196 7.108,0.2 7.103,0.2 7.103,0.21 7.108,0.21 7.108,0.445 7.103,0.445 7.103,0.449 7.108,0.449 7.108,0.459 8.315,0.459 8.315,0.196 7.903,0.196 7.903,0.191 7.899,0.191 7.899,-0.887 7.525,-0.887 7.525,-0.346
  region: 9.192,-1.91 9.192,-1.471 9.086,-1.471 9.086,-1.397 9.189,-1.397 9.189,-1.394 9.192,-1.394 9.192,-1.282 9.195,-1.282 9.195,-1.259 9.198,-1.259 9.198,-1.245 9.201,-1.245 9.201,-1.233 9.204,-1.233 9.204,-1.228 9.206,-1.228 9.206,-1.219 9.209,-1.219 9.209,-1.213 9.212,-1.213 9.212,-1.211 9.215,-1.211 9.215,-1.205 9.218,-1.205 9.218,-1.199 9.221,-1.199 9.221,-1.196 9.224,-1.196 9.224,-1.191 9.227,-1.191 9.227,-1.188 9.229,-1.188 9.229,-1.185 9.232,-1.185 9.232,-1.182 9.235,-1.182 9.235,-1.179 9.238,-1.179 9.238,-1.176 9.241,-1.176 9.241,-1.173 9.247,-1.173 9.247,-1.17 9.249,-1.17 9.249,-1.168 9.252,-1.168 9.252,-1.165 9.258,-1.165 9.258,-1.162 9.261,-1.162 9.261,-1.159 9.267,-1.159 9.267,-1.156 9.272,-1.156 9.272,-1.153 9.278,-1.153 9.278,-1.15 9.287,-1.15 9.287,-1.148 9.292,-1.148 9.292,-1.145 9.301,-1.145 9.301,-1.142 9.313,-1.142 9.313,-1.139 9.324,-1.139 9.324,-1.136 9.41,-1.136 9.41,-1.139 9.421,-1.139 9.421,-1.142 9.436,-1.142 9.436,-1.145 9.444,-1.145 9.444,-1.148 9.447,-1.148 9.447,-1.231 9.444,-1.231 9.444,-1.233 9.413,-1.233 9.413,-1.231 9.37,-1.231 9.37,-1.233 9.35,-1.233 9.35,-1.236 9.338,-1.236 9.338,-1.239 9.333,-1.239 9.333,-1.242 9.327,-1.242 9.327,-1.245 9.321,-1.245 9.321,-1.248 9.318,-1.248 9.318,-1.251 9.315,-1.251 9.315,-1.256 9.313,-1.256 9.313,-1.259 9.31,-1.259 9.31,-1.265 9.307,-1.265 9.307,-1.274 9.304,-1.274 9.304,-1.285 9.301,-1.285 9.301,-1.394 9.304,-1.394 9.304,-1.397 9.43,-1.397 9.43,-1.471 9.301,-1.471 9.301,-1.956 9.192,-1.956 9.192,-1.913
  region: 8.863,-1.193 8.863,-1.15 8.969,-1.15 8.969,-1.956 8.863,-1.956 8.863,-1.196
  region: 495 vertices and 1 holes, not listed, extent 8.226,-1.973 8.734,-1.38
  region: 301 vertices and 1 holes, not listed, extent 7.464,-1.956 8.123,-1.15
  region: 9.754,-1.254 9.754,-1.394 9.756,-1.394 9.756,-1.397 9.885,-1.397 9.885,-1.468 9.883,-1.468 9.883,-1.471 9.754,-1.471 9.754,-1.841 9.756,-1.841 9.756,-1.855 9.759,-1.855 9.759,-1.861 9.762,-1.861 9.762,-1.864 9.765,-1.864 9.765,-1.87 9.768,-1.87 9.768,-1.873 9.771,-1.873 9.771,-1.875 9.777,-1.875 9.777,-1.878 9.779,-1.878 9.779,-1.881 9.785,-1.881 9.785,-1.884 9.791,-1.884 9.791,-1.887 9.802,-1.887 9.802,-1.89 9.819,-1.89 9.819,-1.893 9.828,-1.893 9.828,-1.89 9.857,-1.89 9.857,-1.887 9.871,-1.887 9.871,-1.884 9.88,-1.884 9.88,-1.967 9.868,-1.967 9.868,-1.97 9.845,-1.97 9.845,-1.973 9.765,-1.973 9.765,-1.97 9.742,-1.97 9.742,-1.967 9.731,-1.967 9.731,-1.964 9.719,-1.964 9.719,-1.961 9.711,-1.961 9.711,-1.959 9.705,-1.959 9.705,-1.956 9.699,-1.956 9.699,-1.953 9.693,-1.953 9.693,-1.95 9.688,-1.95 9.688,-1.947 9.685,-1.947 9.685,-1.944 9.679,-1.944 9.679,-1.941 9.676,-1.941 9.676,-1.938 9.673,-1.938 9.673,-1.936 9.67,-1.936 9.67,-1.93 9.668,-1.93 9.668,-1.927 9.665,-1.927 9.665,-1.921 9.662,-1.921 9.662,-1.918 9.659,-1.918 9.659,-1.913 9.656,-1.913 9.656,-1.904 9.653,-1.904 9.653,-1.895 9.65,-1.895 9.65,-1.878 9.648,-1.878 9.648,-1.474 9.645,-1.474 9.645,-1.471 9.55,-1.471 9.55,-1.397 9.645,-1.397 9.645,-1.394 9.648,-1.394 9.648,-1.276 9.653,-1.276 9.653,-1.274 9.662,-1.274 9.662,-1.271 9.67,-1.271 9.67,-1.268 9.679,-1.268 9.679,-1.265 9.691,-1.265 9.691,-1.262 9.699,-1.262 9.699,-1.259 9.708,-1.259 9.708,-1.256 9.716,-1.256 9.716,-1.254 9.725,-1.254 9.725,-1.251 9.736,-1.251 9.736,-1.248 9.745,-1.248 9.745,-1.245 9.754,-1.245 9.754,-1.251

## Silkscreen, mask and mechanical layers (free items; w line width, h text height)
Flex Stack Top Overlay:
  drawing of 28 lines, arcs and shapes, not listed
  text "-SENSOR" at 48.275,-0.725 h2
  text "V400" at 48.25,-1.825 h1
Flex Stack Top Coverlay:
  drawing of 8 lines, arcs and shapes, not listed
Board Shape:
  lines w0.05: 19.7,-2.5 58,-2.5 58,2.5 ; 19.7,-2.5 ccw(c19.7,-3.224) 19.188,-2.712 18.665,-3.235 cw(c18.025,-2.595) 18.025,-3.5 10.207,-3.5 ccw(c10.207,-4.526) 9.481,-3.801 ; 19.718,2.5 cw(c19.718,3.224) 19.206,2.712 18.683,3.235 ccw(c18.043,2.595) 18.043,3.5 10.225,3.5 cw(c10.225,4.526) 9.499,3.801 ; 19.718,2.5 58,2.5 ; 9.332,-3.949 cw(c8.607,-3.224) 8.607,-4.25 2.491,-4.25 cw(c2.5,-3.95) 2.2,-3.941 2.2,3.959 cw(c2.5,3.95) 2.509,4.25 8.625,4.25 cw(c8.625,3.224) 9.351,3.949 ; 9.332,-3.949 ccw(c9.332,-3.949) 9.332,-3.949 ; 9.332,-3.949 ccw(c9.332,-3.949) 9.332,-3.949 ; 9.332,-3.949 9.481,-3.801 ; 9.351,3.949 ccw(c9.351,3.949) 9.351,3.949 ; 9.351,3.949 ccw(c9.351,3.949) 9.351,3.949 ; 9.351,3.949 9.499,3.801 ; 9.481,-3.801 ccw(c9.481,-3.801) 9.481,-3.8 ; 9.499,3.8 ccw(c9.499,3.801) 9.499,3.801 ; 58,2.5 ccw(c58,2.5) 58,2.5 ; 58,2.5 58,2.5
Assembly Notes:
  lines w0.05: 9.332,-3.949 ccw(c9.332,-3.949) 9.332,-3.949 ; 9.332,-3.949 ccw(c9.332,-3.949) 9.332,-3.949 ; 9.332,-3.949 cw(c8.607,-3.224) 8.607,-4.25 2.491,-4.25 cw(c2.5,-3.95) 2.2,-3.941 2.2,3.959 cw(c2.5,3.95) 2.509,4.25 8.625,4.25 cw(c8.625,3.224) 9.351,3.949 ; 9.332,-3.949 9.481,-3.801 ; 9.351,3.949 ccw(c9.351,3.949) 9.351,3.949 ; 9.351,3.949 ccw(c9.351,3.949) 9.351,3.949 ; 9.351,3.949 9.499,3.801 ; 9.481,-3.801 ccw(c9.481,-3.801) 9.481,-3.8 ; 9.481,-3.801 cw(c10.207,-4.526) 10.207,-3.5 18.025,-3.5 ccw(c18.025,-2.595) 18.665,-3.235 19.25,-2.65 19.25,2.5 19.25,2.668 18.683,3.235 ccw(c18.043,2.595) 18.043,3.5 10.225,3.5 cw(c10.225,4.526) 9.499,3.801 ; 9.499,3.8 ccw(c9.499,3.801) 9.499,3.801 ; 20.1,-2.5 25.109,-2.5 25.109,2.5 20.1,2.5 20.1,-2.5 ; 25.625,-2.5 31.05,-2.5 31.05,1.325 25.625,1.325 25.625,-2.5 ; 31.575,-2.5 35.038,-2.5 35.038,2.5 31.575,2.5 31.575,-2.5 ; 35.575,-2.5 39.238,-2.5 39.238,2.5 35.575,2.5 35.575,-2.5 ; 39.775,-2.5 43.9,-2.5 43.9,1.475 39.775,1.475 39.775,-2.5 ; 58,2.5 ccw(c58,2.5) 58,2.5